# EAGLE board cpc_eightrom (EAGLE 6.4)
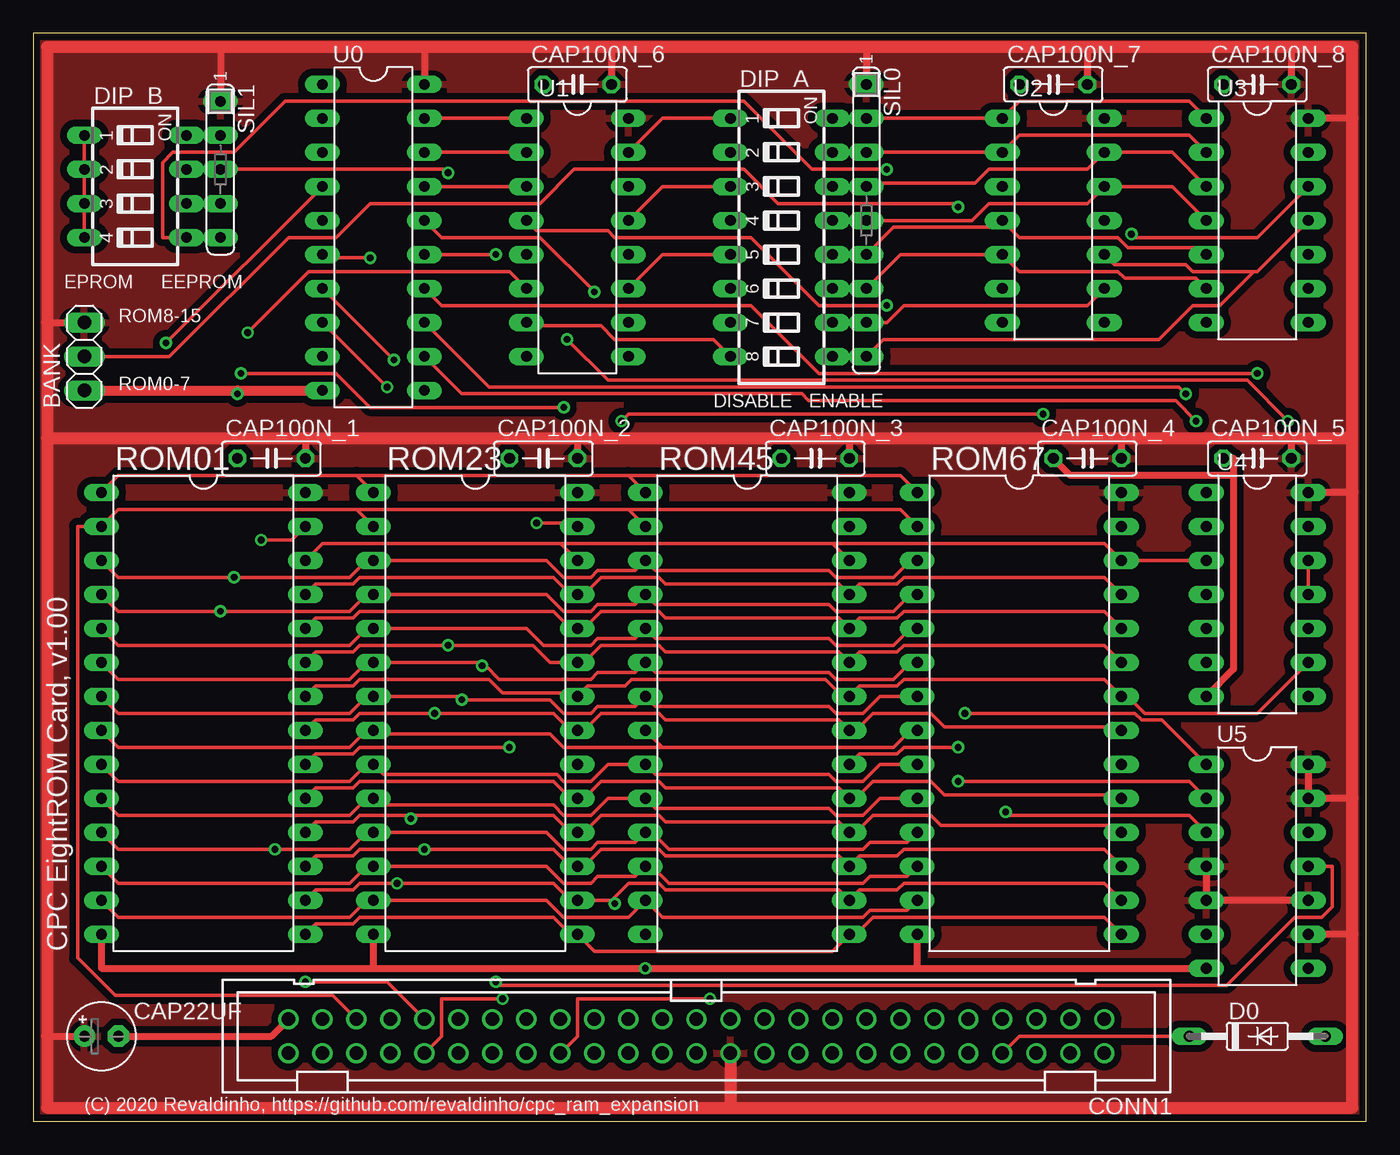
[diagram p0: board, top side]
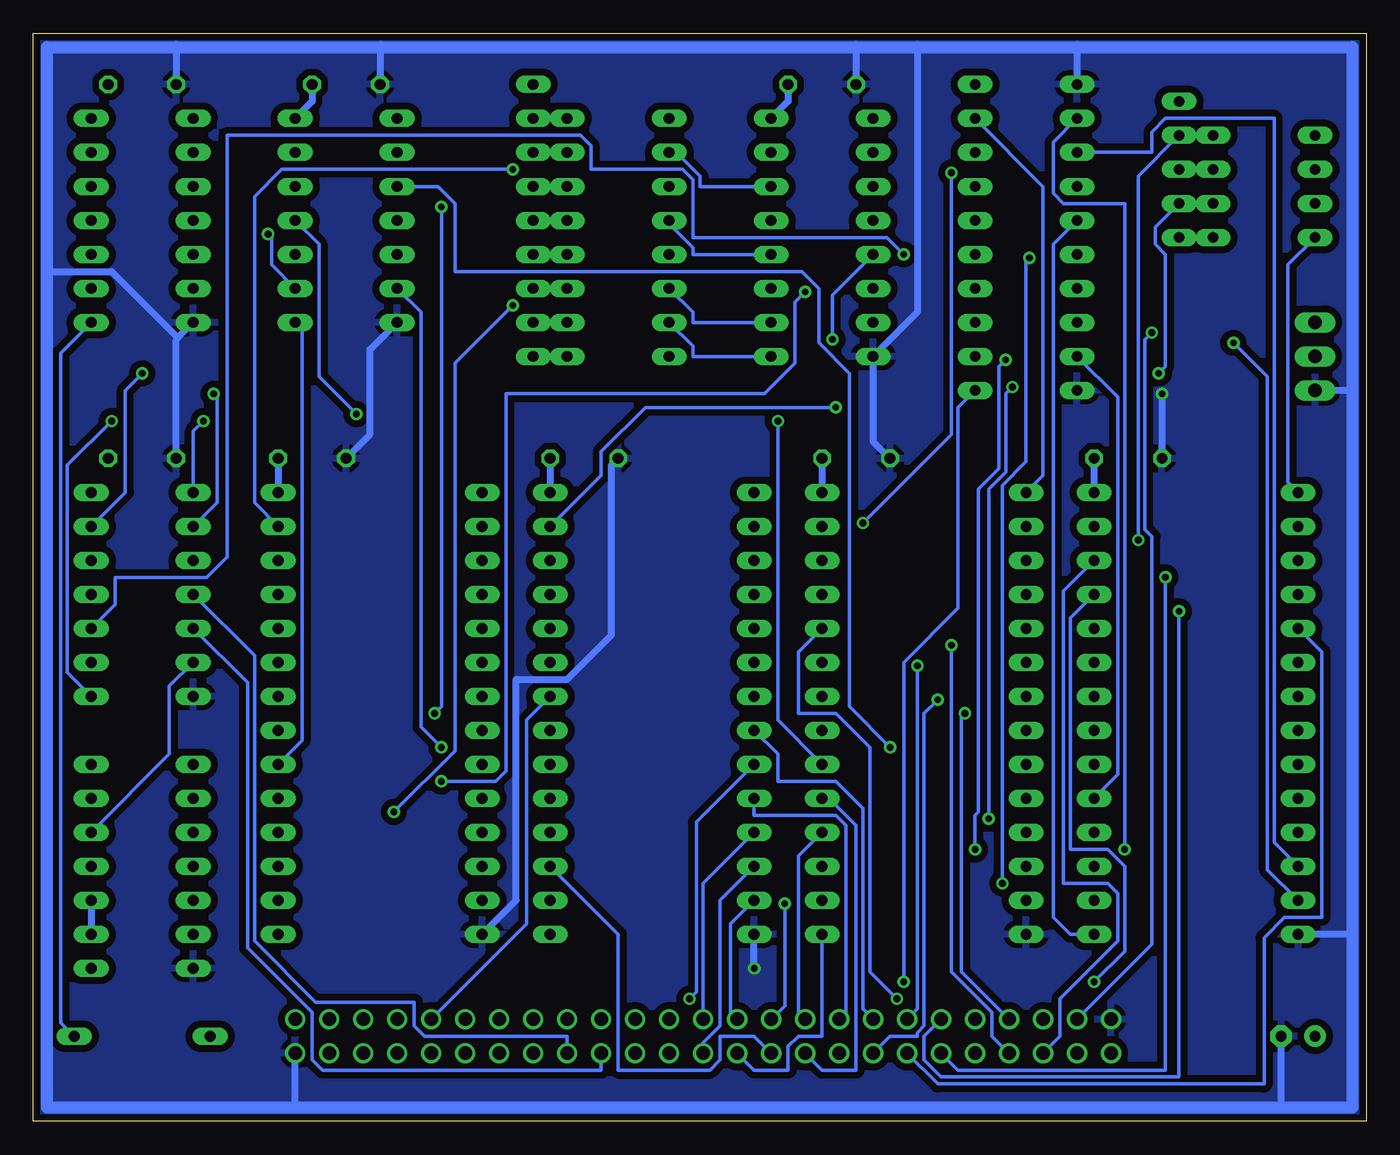
[diagram p1: board, bottom side, seen from below]

Size 99.57 x 81.28 mm. Coordinates in mm from the lower left corner, seen from the top.
Outline: 0,0 99.57,0 99.57,81.28 0,81.28 0,0
Copper layers (1*16): Top 0.035mm / dielectric 1.5mm / Bottom 0.035mm
Design rules "design_rules": minimum track width 10mil, minimum drill 20mil, track to track 10mil, track to pad 10mil, pad to pad 12mil, via to via 12mil, smd to smd 8mil, copper to edge 15mil, drill to drill 8mil, minimum pad ring 10mil, minimum via ring 8mil, stop-mask expansion 4mil, vias tented up to drill 0mil, thermal gap 15mil
Net classes: 0 signal: width 0.254 mm, clearance 0.254 mm; 1 supply: width 0.508 mm, clearance 0.305 mm

## Footprints (pad centres in the part's own frame; a part is rotated, then mirrored left to right if it is on the bottom)
1X03 = drill 1.016 long: 1 -2.54,0; 2 0,0; 3 2.54,0
E2,5-5 = drill 0.813 pad 1.6: + -1.27,0 | drill 0.813 pad 1.6 octagon: - 1.27,0
C050-025X075 = drill 0.813 octagon: 1 -2.54,0; 2 2.54,0
PAK100/2500-50 = drill 1 pad 1.422: 1 -30.48,-1.27; 2 -30.48,1.27; 3 -27.94,-1.27; 4 -27.94,1.27; 5 -25.4,-1.27; 6 -25.4,1.27; 7 -22.86,-1.27; 8 -22.86,1.27; 9 -20.32,-1.27; 10 -20.32,1.27; 11 -17.78,-1.27; 12 -17.78,1.27; 13 -15.24,-1.27; 14 -15.24,1.27; 15 -12.7,-1.27; 16 -12.7,1.27; 17 -10.16,-1.27; 18 -10.16,1.27; 19 -7.62,-1.27; 20 -7.62,1.27; 21 -5.08,-1.27; 22 -5.08,1.27; 23 -2.54,-1.27; 24 -2.54,1.27; 25 0,-1.27; 26 0,1.27; 27 2.54,-1.27; 28 2.54,1.27; 29 5.08,-1.27; 30 5.08,1.27; 31 7.62,-1.27; 32 7.62,1.27; 33 10.16,-1.27; 34 10.16,1.27; 35 12.7,-1.27; 36 12.7,1.27; 37 15.24,-1.27; 38 15.24,1.27; 39 17.78,-1.27; 40 17.78,1.27; 41 20.32,-1.27; 42 20.32,1.27; 43 22.86,-1.27; 44 22.86,1.27; 45 25.4,-1.27; 46 25.4,1.27; 47 27.94,-1.27; 48 27.94,1.27; 49 30.48,-1.27; 50 30.48,1.27
DO35-10 = drill 0.813 long: A 5.08,0; C -5.08,0
SD4-08 = drill 0.813 long: 1 -8.89,-3.81; 2 -6.35,-3.81; 3 -3.81,-3.81; 4 -1.27,-3.81; 5 1.27,-3.81; 6 3.81,-3.81; 7 6.35,-3.81; 8 8.89,-3.81; 9 8.89,3.81; 10 6.35,3.81; 11 3.81,3.81; 12 1.27,3.81; 13 -1.27,3.81; 14 -3.81,3.81; 15 -6.35,3.81; 16 -8.89,3.81
SD4-04 = drill 0.813 long: 1 -3.81,-3.81; 2 -1.27,-3.81; 3 1.27,-3.81; 4 3.81,-3.81; 5 3.81,3.81; 6 1.27,3.81; 7 -1.27,3.81; 8 -3.81,3.81
DIL28 = drill 0.813 long: 1 -16.51,-7.62; 2 -13.97,-7.62; 3 -11.43,-7.62; 4 -8.89,-7.62; 5 -6.35,-7.62; 6 -3.81,-7.62; 7 -1.27,-7.62; 8 1.27,-7.62; 9 3.81,-7.62; 10 6.35,-7.62; 11 8.89,-7.62; 12 11.43,-7.62; 13 13.97,-7.62; 14 16.51,-7.62; 15 16.51,7.62; 16 13.97,7.62; 17 11.43,7.62; 18 8.89,7.62; 19 6.35,7.62; 20 3.81,7.62; 21 1.27,7.62; 22 -1.27,7.62; 23 -3.81,7.62; 24 -6.35,7.62; 25 -8.89,7.62; 26 -11.43,7.62; 27 -13.97,7.62; 28 -16.51,7.62
SIL9 = drill 0.813 long: 1 -10.16,0; 2 -7.62,0; 3 -5.08,0; 4 -2.54,0; 5 0,0; 6 2.54,0; 7 5.08,0; 8 7.62,0; 9 10.16,0
SIL5 = drill 0.813 long: 1 -5.08,0; 2 -2.54,0; 3 0,0; 4 2.54,0; 5 5.08,0
DIL20 = drill 0.813 long: 1 -11.43,-3.81; 2 -8.89,-3.81; 3 -6.35,-3.81; 4 -3.81,-3.81; 5 -1.27,-3.81; 6 1.27,-3.81; 7 3.81,-3.81; 8 6.35,-3.81; 9 8.89,-3.81; 10 11.43,-3.81; 11 11.43,3.81; 12 8.89,3.81; 13 6.35,3.81; 14 3.81,3.81; 15 1.27,3.81; 16 -1.27,3.81; 17 -3.81,3.81; 18 -6.35,3.81; 19 -8.89,3.81; 20 -11.43,3.81
DIL16 = drill 0.813 long: 1 -8.89,-3.81; 2 -6.35,-3.81; 3 -3.81,-3.81; 4 -1.27,-3.81; 5 1.27,-3.81; 6 3.81,-3.81; 7 6.35,-3.81; 8 8.89,-3.81; 9 8.89,3.81; 10 6.35,3.81; 11 3.81,3.81; 12 1.27,3.81; 13 -1.27,3.81; 14 -3.81,3.81; 15 -6.35,3.81; 16 -8.89,3.81
DIL14 = drill 0.813 long: 1 -7.62,-3.81; 2 -5.08,-3.81; 3 -2.54,-3.81; 4 0,-3.81; 5 2.54,-3.81; 6 5.08,-3.81; 7 7.62,-3.81; 8 7.62,3.81; 9 5.08,3.81; 10 2.54,3.81; 11 0,3.81; 12 -2.54,3.81; 13 -5.08,3.81; 14 -7.62,3.81

## Placement (x,y rotation side)
BANK  [1X03]  3.81,57.15 90 top
CAP22UF  [E2,5-5]  5.08,6.35 0 top
CAP100N_1  [C050-025X075]  17.78,49.53 0 top
CAP100N_2  [C050-025X075]  38.1,49.53 0 top
CAP100N_3  [C050-025X075]  58.42,49.53 0 top
CAP100N_4  [C050-025X075]  78.74,49.53 0 top
CAP100N_5  [C050-025X075]  91.44,49.53 0 top
CAP100N_6  [C050-025X075]  40.64,77.47 0 top
CAP100N_7  [C050-025X075]  76.2,77.47 0 top
CAP100N_8  [C050-025X075]  91.44,77.47 0 top
CONN1  [PAK100/2500-50]  49.53,6.35 180 top
D0  [DO35-10]  91.44,6.35 0 top
DIP_A  [SD4-08]  55.88,66.04 270 top
DIP_B  [SD4-04]  7.62,69.85 270 top
ROM01  [DIL28]  12.7,30.48 270 top
ROM23  [DIL28]  33.02,30.48 270 top
ROM45  [DIL28]  53.34,30.48 270 top
ROM67  [DIL28]  73.66,30.48 270 top
SIL0  [SIL9]  62.23,67.31 270 top
SIL1  [SIL5]  13.97,71.12 270 top
U0  [DIL20]  25.4,66.04 270 top
U1  [DIL16]  40.64,66.04 270 top
U2  [DIL14]  76.2,67.31 270 top
U3  [DIL14]  91.44,67.31 270 top
U4  [DIL14]  91.44,39.37 270 top
U5  [DIL14]  91.44,19.05 270 top

## Library data of the parts
BANK = pinhead
CAP22UF CAP100N_1-CAP100N_8 = resistor
CONN1 = con-3m
D0 = diode
DIP_A DIP_B = switch-dil
ROM01 ROM23 ROM45 ROM67 U0 U1-U5 = ic-package
SIL0 SIL1 = resistor-sil

## Nets
A0: CONN1.33 ROM01.10 ROM23.10 ROM45.10 ROM67.10
A1: CONN1.34 ROM01.9 ROM23.9 ROM45.9 ROM67.9
A2: CONN1.35 ROM01.8 ROM23.8 ROM45.8 ROM67.8
A3: CONN1.36 ROM01.7 ROM23.7 ROM45.7 ROM67.7
A4: CONN1.37 ROM01.6 ROM23.6 ROM45.6 ROM67.6
A5: CONN1.38 ROM01.5 ROM23.5 ROM45.5 ROM67.5
A6: CONN1.39 ROM01.4 ROM23.4 ROM45.4 ROM67.4
A7: CONN1.40 ROM01.3 ROM23.3 ROM45.3 ROM67.3
A8: CONN1.41 ROM01.25 ROM23.25 ROM45.25 ROM67.25
A9: CONN1.42 ROM01.24 ROM23.24 ROM45.24 ROM67.24
A10: CONN1.43 ROM01.21 ROM23.21 ROM45.21 ROM67.21
A11: CONN1.44 ROM01.23 ROM23.23 ROM45.23 ROM67.23
A12: CONN1.45 ROM01.2 ROM23.2 ROM45.2 ROM67.2
A13: CONN1.46 ROM01.26 ROM23.26 ROM45.26 ROM67.26 U4.3
A14: CONN1.47 U1.6
A15: CONN1.48
BANK: BANK.2 U5.1
BUSACK_B: CONN1.13
BUSRESET_B: CONN1.11
BUSRQ_B: CONN1.14
CLK: CONN1.1
CS0_B: DIP_A.16 SIL0.2 U2.1 U3.1
CS1_B: DIP_A.15 SIL0.3 U2.2 U3.2
CS2_B: DIP_A.14 SIL0.4 U2.13 U3.3
CS3_B: DIP_A.13 SIL0.5 U2.12 U3.4
CS4_B: DIP_A.12 SIL0.6 U2.4 U3.5
CS5_B: DIP_A.11 SIL0.7 U2.5 U3.6
CS6_B: DIP_A.10 SIL0.8 U2.9 U3.12
CS7_B: DIP_A.9 SIL0.9 U2.10 U3.11
CURSOR: CONN1.5
D0: CONN1.25 ROM01.11 ROM23.11 ROM45.11 ROM67.11 U0.2
D1: CONN1.26 ROM01.12 ROM23.12 ROM45.12 ROM67.12 U0.3
D2: CONN1.27 ROM01.13 ROM23.13 ROM45.13 ROM67.13 U0.4
D3: CONN1.28 ROM01.15 ROM23.15 ROM45.15 ROM67.15 U0.5
D4: CONN1.29 ROM01.16 ROM23.16 ROM45.16 ROM67.16 U0.6
D5: CONN1.30 ROM01.17 ROM23.17 ROM45.17 ROM67.17 U0.7
D6: CONN1.31 ROM01.18 ROM23.18 ROM45.18 ROM67.18 U0.8
D7: CONN1.32 ROM01.19 ROM23.19 ROM45.19 ROM67.19 U0.9
EPROM01_A14: DIP_B.8 ROM01.27 SIL1.2
EPROM23_A14: DIP_B.7 ROM23.27 SIL1.3
EPROM45_A14: DIP_B.6 ROM45.27 SIL1.4
EPROM67_A14: DIP_B.5 ROM67.27 SIL1.5
EXP_B: CONN1.3
GND [supply]: BANK.1 CAP22UF.- CAP100N_1.1 CAP100N_2.1 CAP100N_3.1 CAP100N_4.1 CAP100N_5.1 CAP100N_6.1 CAP100N_7.1 CAP100N_8.1 CONN1.2 CONN1.49 ROM01.14 ROM23.14 ROM45.14 ROM67.14 U0.1 U0.10 U1.8 U2.7 U3.7 U4.7 U5.7
HALT_B: CONN1.17
INT_B: CONN1.16
IOREQ_B: CONN1.20 U4.5
LAT_EN: U0.11 U5.11
LAT_EN_B: U4.6 U5.12
LPEN: CONN1.4
M1_B: CONN1.22
MREQ_B: CONN1.23
N1: U1.4 U5.3
N2: U4.11 U4.12
N3: U1.5 U4.8
NMI_B: CONN1.15
Q0: DIP_B.1 DIP_B.2 DIP_B.3 DIP_B.4 ROM01.1 ROM23.1 ROM45.1 ROM67.1 U0.19 U1.1
Q1: U0.18 U1.2
Q2: U0.17 U1.3
Q3: U0.16 U5.2
Q4: U0.15 U4.10
Q5: U0.14 U4.13
Q6: U0.13 U4.2
Q7: U0.12 U4.1
RAMDIS: CONN1.6
RAMRD_B: CONN1.7
RD_B: CONN1.19
READY: CONN1.12
RESET_B: CONN1.10
RFSH_B: CONN1.21
ROMCS01_B: ROM01.20 U2.3
ROMCS23_B: ROM23.20 U2.11
ROMCS45_B: ROM45.20 U2.6
ROMCS67_B: ROM67.20 U2.8
ROMDIS: CONN1.8 D0.C
ROMDIS_PRE: D0.A U3.8
ROMEN_B: CONN1.9 ROM01.22 ROM23.22 ROM45.22 ROM67.22 U4.9
S0_B: DIP_A.1 U1.15
S1_B: DIP_A.2 U1.14
S2_B: DIP_A.3 U1.13
S3_B: DIP_A.4 U1.12
S4_B: DIP_A.5 U1.11
S5_B: DIP_A.6 U1.10
S6_B: DIP_A.7 U1.9
S7_B: DIP_A.8 U1.7
SOUND: CONN1.50
VDD [supply]: BANK.3 CAP22UF.+ CAP100N_1.2 CAP100N_2.2 CAP100N_3.2 CAP100N_4.2 CAP100N_5.2 CAP100N_6.2 CAP100N_7.2 CAP100N_8.2 CONN1.24 ROM01.28 ROM23.28 ROM45.28 ROM67.28 SIL0.1 SIL1.1 U0.20 U1.16 U2.14 U3.14 U4.14 U5.4 U5.5 U5.9 U5.10 U5.13 U5.14
WR_B: CONN1.18 U4.4

## Tracks (layer width: path | path; a pad name or v marks a point on that pad's centre or on a via)
A0
  Top 0.254: ROM01.10 6.35,22.86 23.62,22.86 24.89,24.13 ROM23.10 25.91,23.62 38.86,23.62 39.62,22.86 41.66,22.86 42.93,24.13 ROM45.10 46.48,23.37 59.44,23.37 59.94,22.86 61.98,22.86 63.25,24.13 ROM67.10
  Bottom 0.254: CONN1.33 38.86,8.13 38.86,22.1 39.62,22.86 45.72,22.86 ROM45.10
A1  (via drill 0.51)
  Top 0.254: ROM01.9 6.35,25.4 23.62,25.4 24.89,26.67 ROM23.9 26.16,25.91 39.12,25.91 39.62,25.4 41.66,25.4 42.93,26.67 ROM45.9 46.48,25.91 59.44,25.91 59.94,25.4 61.98,25.4 63.25,26.67 ROM67.9 | CONN1.34 40.64,6.35 40.64,9.14 v50.55,9.14
  Bottom 0.254: v50.55,9.14 50.04,9.65 50.04,22.35 ROM45.9
A2
  Top 0.254: ROM01.8 6.35,27.94 23.62,27.94 24.89,29.21 ROM23.8 25.65,28.96 38.61,28.96 39.62,27.94 46.99,27.94 | 46.99,27.94 ROM45.8 | 46.99,27.94 64.26,27.94 65.53,29.21 ROM67.8
  Bottom 0.254: CONN1.35 37.59,8.38 37.59,23.37 39.62,25.4 43.94,25.4 43.94,27.43 ROM45.8
A3  (via drill 0.51)
  Top 0.254: ROM67.7 63.25,31.75 61.98,30.48 59.94,30.48 59.44,30.99 46.48,30.99 ROM45.7 44.96,30.99 42.16,30.99 41.66,30.48 39.62,30.48 38.61,31.5 v32,31.5 31.75,31.75 ROM23.7 24.89,31.75 23.62,30.48 6.35,30.48 ROM01.7
  Bottom 0.254: CONN1.36 35.56,6.35 33.53,6.35 33.53,6.6 33.02,7.11 33.02,30.48 v32,31.5
A4  (via drill 0.51)
  Top 0.254: ROM67.6 65.53,34.29 64.26,33.02 59.94,33.02 59.44,33.53 46.48,33.53 ROM45.6 44.96,33.53 42.16,33.53 41.66,33.02 34.8,33.02 33.78,34.04 v33.53,34.04 33.27,34.29 ROM23.6 24.89,34.29 23.62,33.02 6.35,33.02 ROM01.6
  Bottom 0.254: CONN1.37 33.53,8.38 v33.53,34.04
A5
  Top 0.254: ROM67.5 65.53,36.83 64.26,35.56 59.94,35.56 59.44,36.07 46.48,36.07 ROM45.5 44.96,36.07 42.16,36.07 41.66,35.56 38.1,35.56 36.83,36.83 ROM23.5 24.89,36.83 23.62,35.56 6.35,35.56 ROM01.5
  Bottom 0.254: CONN1.38 32,2.79 7.62,2.79 7.62,13.72 6.1,15.24 3.3,15.24 3.3,35.05 ROM01.5
A6  (via drill 0.51)
  Top 0.254: ROM67.4 65.53,39.37 64.26,38.1 59.94,38.1 59.44,38.61 46.48,38.61 ROM45.4 44.96,38.61 42.16,38.61 41.66,38.1 39.62,38.1 38.35,39.37 ROM23.4 24.89,39.37 23.62,38.1 v13.97,38.1 6.35,38.1 ROM01.4
  Bottom 0.254: CONN1.39 33.02,6.35 33.02,4.57 31.75,3.3 13.97,3.3 v13.97,38.1
A7  (via drill 0.51)
  Top 0.254: ROM67.3 65.53,41.91 64.26,40.64 59.94,40.64 59.44,41.15 46.48,41.15 ROM45.3 44.96,41.15 42.16,41.15 41.66,40.64 39.62,40.64 38.35,41.91 ROM23.3 24.89,41.91 23.62,40.64 v14.99,40.64 6.35,40.64 ROM01.3
  Bottom 0.254: CONN1.40 30.48,3.81 14.99,3.81 v14.99,40.64
A8  (via drill 0.51)
  Top 0.254: ROM67.25 80.01,40.64 65.02,40.64 64.52,40.13 61.72,40.13 ROM45.25 60.2,40.13 47.24,40.13 46.74,40.64 42.42,40.64 41.15,39.37 ROM23.25 40.13,39.37 38.86,40.64 24.38,40.64 23.88,40.13 21.08,40.13 ROM01.25 | CONN1.41 26.42,10.41 v20.32,10.41
  Bottom 0.254: v20.32,10.41 18.03,12.7 18.03,19.05 19.3,20.32 22.1,20.32 22.1,37.59 ROM01.25
A9  (via drill 0.51)
  Top 0.254: ROM67.24 80.01,38.1 65.02,38.1 64.52,37.59 61.72,37.59 ROM45.24 60.2,37.59 47.24,37.59 46.74,38.1 42.42,38.1 41.15,36.83 ROM23.24 40.13,36.83 38.86,38.1 24.38,38.1 23.88,37.59 21.08,37.59 ROM01.24 | CONN1.42 30.48,6.35 30.48,9.14 v35.05,9.14
  Bottom 0.254: v35.05,9.14 37.08,11.18 37.08,27.94 39.62,30.48 42.42,30.48 42.42,35.05 ROM23.24
A10  (via drill 0.51)
  Top 0.254: ROM01.21 21.08,29.97 23.88,29.97 24.38,30.48 v29.97,30.48 38.86,30.48 40.13,29.21 ROM23.21 41.15,29.21 42.42,30.48 46.74,30.48 47.24,29.97 60.2,29.97 ROM45.21 61.47,29.21 62.74,30.48 67.06,30.48 68.07,29.46 81.03,29.46 ROM67.21
  Bottom 0.254: CONN1.43 30.23,11.18 30.23,30.23 v29.97,30.48
A11  (via drill 0.51)
  Top 0.254: ROM67.23 80.01,35.56 65.02,35.56 64.52,35.05 61.72,35.05 ROM45.23 60.2,35.05 47.24,35.05 46.74,35.56 42.42,35.56 41.15,34.29 ROM23.23 38.61,34.29 37.34,35.56 v30.99,35.56 24.38,35.56 23.88,35.05 21.08,35.05 ROM01.23
  Bottom 0.254: CONN1.44 27.94,6.35 27.94,8.13 30.99,11.18 v30.99,35.56
A12
  Top 0.254: 24.13,45.72 6.35,45.72 ROM01.2 3.3,44.45 3.3,12.19 6.1,9.4 22.35,9.4 CONN1.45 | ROM23.2 24.13,45.72 | 44.45,45.72 ROM45.2 | 24.13,45.72 44.45,45.72 | ROM67.2 64.77,45.72 44.45,45.72
A13
  Top 0.254: U4.3 ROM67.26 80.01,43.18 59.69,43.18 | ROM01.26 21.59,43.18 39.37,43.18 | ROM23.26 39.37,43.18 | 59.69,43.18 ROM45.26 | 39.37,43.18 59.69,43.18
  Bottom 0.254: CONN1.46 22.86,6.35 22.86,9.14 18.54,13.46 18.54,17.02 19.3,17.78 22.61,17.78 22.61,39.62 ROM01.26
A14  (via drill 0.51)
  Top 0.254: U1.6 35.56,63.5 20.57,63.5 v16,58.93
  Bottom 0.254: v16,58.93 16.51,58.42 16.51,44.2 16,43.69 16,13.21 CONN1.47
BANK  (via drill 0.51)
  Top 0.254: U5.1 84.33,29.97 82.8,29.97 82.3,30.48 v69.6,30.48 | v69.09,68.33 68.83,68.58 55.63,68.58 53.09,71.12 40.39,71.12 37.85,68.58 25.15,68.58 22.61,66.04 19.05,66.04 10.16,57.15 BANK.2
  Bottom 0.254: v69.6,30.48 69.09,30.99 v69.09,68.33
CS0_B
  Top 0.254: DIP_A.16 SIL0.2 U2.1 73.66,76.2 86.36,76.2 U3.1
CS1_B
  Top 0.254: DIP_A.15 SIL0.3 U2.2 73.66,73.66 86.36,73.66 U3.2
CS2_B
  Top 0.254: DIP_A.14 SIL0.4 62.48,70.1 70.36,70.1 71.37,71.12 78.74,71.12 U2.13 85.09,72.39 U3.3
CS3_B
  Top 0.254: DIP_A.13 SIL0.5 70.1,67.31 71.37,68.58 78.74,68.58 U2.12 85.09,69.85 U3.4
CS4_B
  Top 0.254: DIP_A.12 SIL0.6 64.26,66.8 72.9,66.8 | U3.5 87.12,65.28 81.79,65.28 81.03,66.04 73.66,66.04 72.9,66.8 | 72.9,66.8 U2.4
CS5_B
  Top 0.254: DIP_A.11 SIL0.7 64.77,64.77 U2.5 73.66,63.5 81.03,63.5 81.53,62.99 86.87,62.99 U3.6
CS6_B  (via drill 0.51)
  Top 0.254: DIP_A.10 SIL0.8 63.75,59.69 65.02,60.96 78.74,60.96 U2.9 | U3.12 91.44,66.04 82.3,66.04 v82.04,66.29
  Bottom 0.254: v82.04,66.29 81.79,66.04 81.79,64.01 U2.9
CS7_B
  Top 0.254: DIP_A.9 SIL0.9 63.5,58.42 84.07,58.42 86.61,60.96 88.65,60.96 91.19,63.5 | U2.10 80.77,64.01 86.11,64.01 86.61,63.5 91.19,63.5 | 91.19,63.5 91.44,63.5 U3.11
D0  (via drill 0.51)
  Top 0.254: ROM67.11 65.28,20.83 62.48,20.83 61.98,20.32 47.5,20.32 46.23,21.59 ROM45.11 44.96,20.83 42.16,20.83 41.66,20.32 39.62,20.32 38.35,21.59 ROM23.11 24.89,21.59 23.62,20.32 v18.03,20.32 6.35,20.32 ROM01.11
  Bottom 0.254: ROM45.11 49.53,17.78 CONN1.25 | U0.2 23.37,73.15 23.37,69.34 22.61,68.58 18.03,68.58 v18.03,20.32
D1
  Top 0.254: ROM67.12 65.28,18.29 62.48,18.29 61.98,17.78 47.5,17.78 46.23,19.05 ROM45.12 44.96,18.29 42.16,18.29 41.66,17.78 39.62,17.78 38.35,19.05 ROM23.12 24.89,19.05 23.62,17.78 6.35,17.78 ROM01.12
  Bottom 0.254: ROM45.12 48.26,16.51 48.26,7.11 49.53,5.84 CONN1.26 | U0.3 16,72.39 16,73.91 14.99,74.93 6.86,74.93 6.86,20.83 ROM01.12
D2  (via drill 0.51)
  Top 0.254: ROM67.13 65.28,15.75 62.48,15.75 61.98,15.24 46.99,15.24 ROM45.13 44.45,15.24 39.62,15.24 38.35,16.51 ROM23.13 24.89,16.51 23.62,15.24 6.35,15.24 ROM01.13 | v9.91,58.17 U0.4
  Bottom 0.254: ROM45.13 47.5,14.73 47.5,8.13 CONN1.27 | v9.91,58.17 7.37,55.63 7.37,18.8 ROM01.13
D3
  Top 0.254: ROM01.15 21.08,14.73 23.88,14.73 24.38,15.24 38.86,15.24 40.13,13.97 ROM23.15 41.91,12.7 59.69,12.7 ROM45.15 61.47,13.97 62.74,15.24 80.01,15.24 ROM67.15
  Bottom 0.254: U0.5 23.37,65.53 23.37,15.24 22.1,13.97 ROM01.15 | CONN1.28 45.72,3.81 43.18,3.81 43.18,5.59 42.42,6.35 40.64,6.35 ROM23.15
D4  (via drill 0.51)
  Top 0.254: ROM67.16 80.01,17.78 65.02,17.78 64.52,17.27 61.72,17.27 ROM45.16 60.2,17.27 47.24,17.27 46.74,17.78 44.45,17.78 43.18,16.51 | ROM01.16 21.08,17.27 23.88,17.27 24.38,17.78 v27.18,17.78 38.86,17.78 40.13,16.51 ROM23.16 43.18,16.51 | U0.6 21.84,64.52 v25.15,64.52 | 43.18,16.51 v43.43,16.26
  Bottom 0.254: v25.15,64.52 25.4,64.26 25.4,49.28 27.18,47.5 v27.18,17.78 | CONN1.29 43.43,8.64 v43.43,16.26
D5  (via drill 0.51)
  Top 0.254: ROM67.17 80.01,20.32 65.02,20.32 64.52,19.81 61.72,19.81 ROM45.17 60.2,19.81 47.24,19.81 46.74,20.32 42.42,20.32 41.15,19.05 ROM23.17 40.13,19.05 38.86,20.32 v29.21,20.32 24.38,20.32 23.88,19.81 21.08,19.81 ROM01.17 | v26.92,56.9 U0.7
  Bottom 0.254: CONN1.30 45.72,6.35 48.26,6.35 48.26,4.57 49.02,3.81 55.88,3.81 55.88,13.97 ROM45.17 | v26.92,56.9 27.43,56.39 27.43,48.77 28.96,47.24 28.96,23.11 29.21,22.86 v29.21,20.32
D6  (via drill 0.51)
  Top 0.254: ROM01.18 21.08,22.35 23.88,22.35 24.38,22.86 28.19,22.86 | 28.19,22.86 38.86,22.86 40.13,21.59 ROM23.18 41.15,21.59 42.42,22.86 46.74,22.86 47.24,22.35 60.2,22.35 ROM45.18 61.47,21.59 62.74,22.86 67.06,22.86 67.82,22.1 80.77,22.1 ROM67.18 | v26.42,54.86 U0.8 | 28.19,22.86 v28.19,22.61
  Bottom 0.254: v26.42,54.86 26.92,54.36 26.92,48.51 28.19,47.24 v28.19,22.61 | CONN1.31 42.42,8.13 42.42,19.81 ROM23.18
D7
  Top 0.254: ROM01.19 21.08,24.89 23.88,24.89 24.38,25.4 38.86,25.4 40.13,24.13 ROM23.19 41.15,24.13 42.42,25.4 46.74,25.4 47.24,24.89 60.2,24.89 ROM45.19 61.47,24.13 62.74,25.4 67.06,25.4 68.07,24.38 81.03,24.38 ROM67.19
  Bottom 0.254: U0.9 18.54,54.1 18.54,25.91 ROM01.19 | CONN1.32 40.64,3.81 38.1,3.81 38.1,22.1 40.13,24.13 ROM23.19
EPROM01_A14  (via drill 0.51)
  Top 0.254: SIL1.2 DIP_B.8 | ROM01.27 19.3,43.43 v17.02,43.43
  Bottom 0.254: v17.02,43.43 17.02,70.61 SIL1.2
EPROM23_A14  (via drill 0.51)
  Top 0.254: DIP_B.7 SIL1.3 30.73,71.12 v30.99,70.87 | ROM23.27 40.39,44.7 v37.59,44.7
  Bottom 0.254: v37.59,44.7 30.99,51.31 v30.99,70.87
EPROM45_A14  (via drill 0.51)
  Top 0.254: SIL1.4 DIP_B.6 | v39.62,53.34 25.15,53.34 22.61,55.88 v15.49,55.88
  Bottom 0.254: ROM45.27 57.15,48.26 57.15,50.04 53.85,53.34 v39.62,53.34 | v15.49,55.88 14.99,56.39 14.99,64.77 15.75,65.53 15.75,66.8 SIL1.4
EPROM67_A14  (via drill 0.51)
  Top 0.254: SIL1.5 DIP_B.5 9.65,66.04 9.65,71.63 10.41,72.39 14.99,72.39 18.8,76.2 53.09,76.2 58.17,71.12 v63.75,71.12
  Bottom 0.254: ROM67.27 83.06,46.23 83.06,69.09 81.03,71.12 v63.75,71.12
GND  (via drill 0.51)
  Top 0.508: ROM01.14 5.08,11.43 25.4,11.43 | 25.4,11.43 v45.72,11.43 66.04,11.43 | 66.04,11.43 U5.7 | 25.4,11.43 ROM23.14 | 66.04,11.43 ROM67.14 | U4.7 89.66,33.78 89.66,48.26 | 89.66,48.26 89.66,49.53 CAP100N_5.1 | CAP100N_4.1 77.47,48.26 89.66,48.26 | CONN1.49 17.78,6.35 CAP22UF.- | v15.24,54.36 15.24,54.61
  Top 0.762: BANK.1 15.24,54.61 U0.10
  Bottom 0.508: v45.72,11.43 ROM45.14 | CAP100N_3.1 56.39,49.02 56.39,36.32 59.69,33.02 63.5,33.02 63.5,16.51 ROM67.14 | U2.7 74.42,57.66 74.42,51.31 CAP100N_4.1 | 88.77,58.55 88.9,58.42 CAP100N_5.1 | 88.77,58.55 U3.7 | CAP100N_2.1 36.83,50.8 U1.8 33.53,60.45 33.53,80.26 | v15.24,54.36 CAP100N_1.1 | 21.59,80.26 U0.1 | 38.1,80.26 CAP100N_6.1 | 73.66,80.26 CAP100N_7.1 | 88.9,80.26 CAP100N_8.1 | 80.01,1.02 CONN1.2 | 1.02,54.61 BANK.1 | 6.35,1.02 CAP22UF.- | 88.77,58.55 93.73,63.5 98.55,63.5 | 1.02,13.97 ROM01.14
  Bottom 0.889: 1.02,1.02 6.35,1.02 80.01,1.02 98.55,1.02 98.55,63.5 98.55,80.26 88.9,80.26 73.66,80.26 38.1,80.26 33.53,80.26 21.59,80.26 1.02,80.26 1.02,54.61 1.02,13.97 1.02,1.02
  pour Bottom (isolate 0.508): 0,0 0,81.28 99.06,81.28 99.06,0
IOREQ_B
  Bottom 0.254: U4.5 83.57,32.77 83.57,12.95 78.74,8.13 78.74,4.57 77.98,3.81 57.15,3.81 CONN1.20
LAT_EN  (via drill 0.51)
  Top 0.254: v34.54,10.41 34.8,10.16 89.15,10.16 94.23,15.24 96.27,15.24 97.03,16 97.03,19.05 U5.11
  Bottom 0.254: U0.11 30.48,53.34 30.48,38.35 34.54,34.29 v34.54,10.41
LAT_EN_B
  Bottom 0.254: U5.12 89.41,27.43 89.41,32.51 U4.6
N1  (via drill 0.51)
  Top 0.254: U1.4 37.59,66.55 42.93,66.55 43.43,66.04 53.59,66.04 58.67,60.96 v63.75,60.96 | v72.64,23.11 72.9,22.86 86.36,22.86 U5.3
  Bottom 0.254: v63.75,60.96 68.07,56.64 68.07,27.69 v72.64,23.11
N2
  Top 0.254: U4.12 U4.11
N3  (via drill 0.51)
  Top 0.254: v39.88,58.42 42.93,55.37 90.68,55.37 v93.73,52.32
  Bottom 0.254: U1.5 39.88,61.72 v39.88,58.42 | v93.73,52.32 97.03,49.02 97.03,33.53 U4.8
Q0
  Top 0.254: U1.1 U0.19 | DIP_B.1 DIP_B.2 DIP_B.3 DIP_B.4 | 24.13,48.26 ROM23.1 | 24.13,48.26 6.35,48.26 ROM01.1 | 44.45,48.26 ROM45.1 | 24.13,48.26 44.45,48.26 | ROM67.1 64.77,48.26 44.45,48.26
  Bottom 0.254: ROM01.1 5.84,47.75 5.84,64.01 DIP_B.4 | U0.19 24.13,69.85 24.13,48.26 ROM23.1
Q1
  Top 0.254: U1.2 U0.18
Q2
  Top 0.254: U1.3 U0.17
Q3  (via drill 0.51)
  Top 0.254: U0.16 30.48,66.04 37.85,66.04 v41.91,61.98 | v69.09,25.4 86.36,25.4 U5.2
  Bottom 0.254: v41.91,61.98 42.67,61.21 42.67,56.64 44.96,54.36 64.26,54.36 64.26,26.16 65.02,25.4 v69.09,25.4
Q4  (via drill 0.51)
  Top 0.254: v34.54,64.77 U0.15
  Bottom 0.254: v34.54,64.77 35.81,66.04 50.29,66.04 50.29,70.36 51.05,71.12 57.91,71.12 57.91,72.9 58.67,73.66 85.09,73.66 85.09,42.16 86.61,40.64 93.47,40.64 93.47,38.61 U4.10
Q5  (via drill 0.51)
  Top 0.254: U0.14 30.48,60.96 53.59,60.96 58.67,55.88 v91.44,55.88
  Bottom 0.254: v91.44,55.88 92.71,54.61 92.71,46.99 U4.13
Q6  (via drill 0.51)
  Top 0.254: U0.13 34.04,54.86 85.6,54.86 v86.11,54.36
  Bottom 0.254: v86.11,54.36 85.85,54.1 85.85,46.23 U4.2
Q7  (via drill 0.51)
  Top 0.254: U0.12 32,54.36 57.4,54.36 57.91,53.85 85.34,53.85 v86.87,52.32
  Bottom 0.254: v86.87,52.32 87.63,51.56 U4.1
ROMCS01_B  (via drill 0.51)
  Top 0.254: ROM01.20 21.08,27.43 23.88,27.43 24.38,27.94 v35.56,27.94
  Bottom 0.254: v35.56,27.94 38.61,30.99 38.61,55.88 40.89,58.17 40.89,62.23 42.16,63.5 68.07,63.5 68.07,68.58 69.34,69.85 U2.3
ROMCS23_B  (via drill 0.51)
  Top 0.254: v43.94,52.32 44.45,52.83 v75.44,52.83
  Bottom 0.254: ROM23.20 43.94,29.97 v43.94,52.32 | v75.44,52.83 78.23,55.63 78.23,65.53 U2.11
ROMCS45_B  (via drill 0.51)
  Top 0.254: ROM45.20 61.72,27.43 64.52,27.43 65.02,27.94 v69.09,27.94
  Bottom 0.254: v69.09,27.94 70.61,29.46 70.61,60.45 U2.6
ROMCS67_B
  Bottom 0.254: ROM67.20 79.5,28.45 79.5,59.18 U2.8
ROMDIS
  Top 0.254: D0.C 73.66,6.35 CONN1.8
ROMDIS_PRE
  Bottom 0.254: D0.A 97.54,7.37 97.54,57.4 U3.8
ROMEN_B
  Top 0.254: ROM01.22 21.08,32.51 23.88,32.51 24.38,33.02 34.04,33.02 35.05,32 40.39,32 ROM23.22 41.4,32.51 44.2,32.51 44.7,33.02 59.18,33.02 60.45,31.75 ROM45.22 61.72,32.51 64.52,32.51 65.02,33.02 80.01,33.02 ROM67.22 81.79,31.75 83.06,30.48 91.44,30.48 U4.9
  Bottom 0.254: CONN1.9 62.74,14.73 62.74,29.97 ROM45.22
S0_B
  Top 0.254: U1.15 46.99,74.93 DIP_A.1
S1_B
  Bottom 0.254: U1.14 49.78,69.85 49.78,70.61 51.56,72.39 DIP_A.2
S2_B
  Top 0.254: U1.13 46.99,69.85 DIP_A.3
S3_B
  Bottom 0.254: U1.12 50.29,64.77 50.29,65.28 52.07,67.06 DIP_A.4
S4_B
  Top 0.254: U1.11 46.99,64.77 DIP_A.5
S5_B
  Bottom 0.254: U1.10 50.29,59.69 50.29,60.45 DIP_A.6
S6_B
  Bottom 0.254: U1.9 50.29,57.15 50.29,57.91 DIP_A.7
S7_B
  Top 0.254: U1.7 37.08,59.44 42.42,59.44 43.43,58.42 50.8,58.42 DIP_A.8
VDD
  Top 0.508: U5.14 U5.13 98.55,24.13 | U5.4 U5.5 U5.10 | 13.97,80.26 SIL1.1 | 29.21,80.26 U0.20 | 43.18,80.26 CAP100N_6.2 | 62.23,80.26 SIL0.1 | 93.98,51.05 CAP100N_5.2 | 98.55,46.99 U4.14 | 78.74,80.26 CAP100N_7.2 | 93.98,80.26 CAP100N_8.2 | 98.55,74.93 U3.14 | 1.02,59.69 BANK.3 | 1.02,6.35 CAP22UF.+ | 20.32,51.05 CAP100N_1.2 | 40.64,51.05 CAP100N_2.2 | 60.96,51.05 CAP100N_3.2 | 98.55,13.97 U5.9 | 81.28,51.05 CAP100N_4.2
  Top 0.889: 52.07,1.02 1.02,1.02 1.02,6.35 1.02,51.05 | 52.07,1.02 98.55,1.02 98.55,13.97 98.55,24.13 98.55,46.99 98.55,74.93 98.55,80.26 93.98,80.26 78.74,80.26 62.23,80.26 43.18,80.26 29.21,80.26 13.97,80.26 1.02,80.26 1.02,59.69 1.02,51.05 | CONN1.24 52.07,1.02 | 1.02,51.05 20.32,51.05 40.64,51.05 60.96,51.05 81.28,51.05 93.98,51.05 98.04,51.05
  Bottom 0.508: CAP100N_4.2 ROM67.28 | U5.10 U5.9 | CAP100N_3.2 ROM45.28 | CAP100N_2.2 ROM23.28 | CAP100N_1.2 ROM01.28 | U1.16 43.18,76.2 CAP100N_6.2 | U2.14 78.74,76.2 CAP100N_7.2
  pour Top (isolate 0.508): 0,0 0,81.28 99.06,81.28 99.06,0
WR_B
  Bottom 0.254: U4.4 83.06,34.8 83.06,13.46 78.49,8.89 71.12,8.89 71.12,7.11 70.36,6.35 59.69,6.35 CONN1.18

## Text on the board
tPlace: EPROM EEPROM | ROM8-15 | ROM0-7 | DISABLE ENABLE | CPC EightROM Card, v1.00 | (C) 2020 Revaldinho, https://github.com/revaldinho/cpc_ram_expansion